# Altium PCB MSampler.PcbDoc
Units mil, origin at the board's own origin, x right, y up, seen from the top; angles counter-clockwise.
Board outline 2555.12 x 1345 mil, 2 copper layers (Top Layer, Bottom Layer), stack 12.8 mil thick; 97 components, 66 nets, 327 pads, 353 vias.
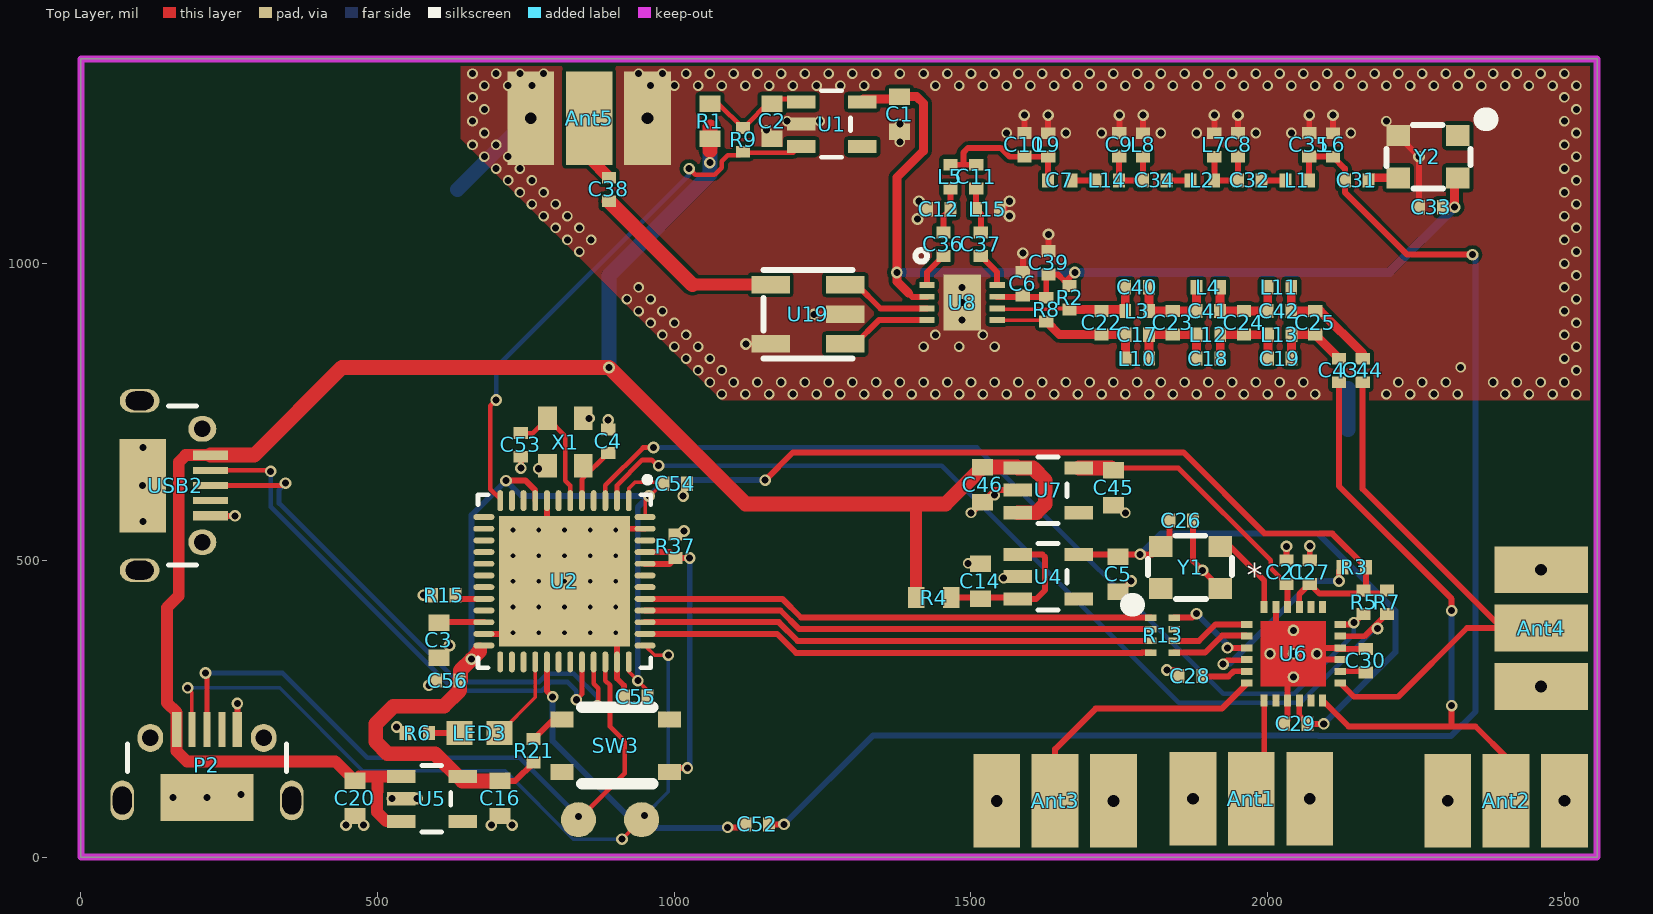
[diagram p0: Top Layer view]
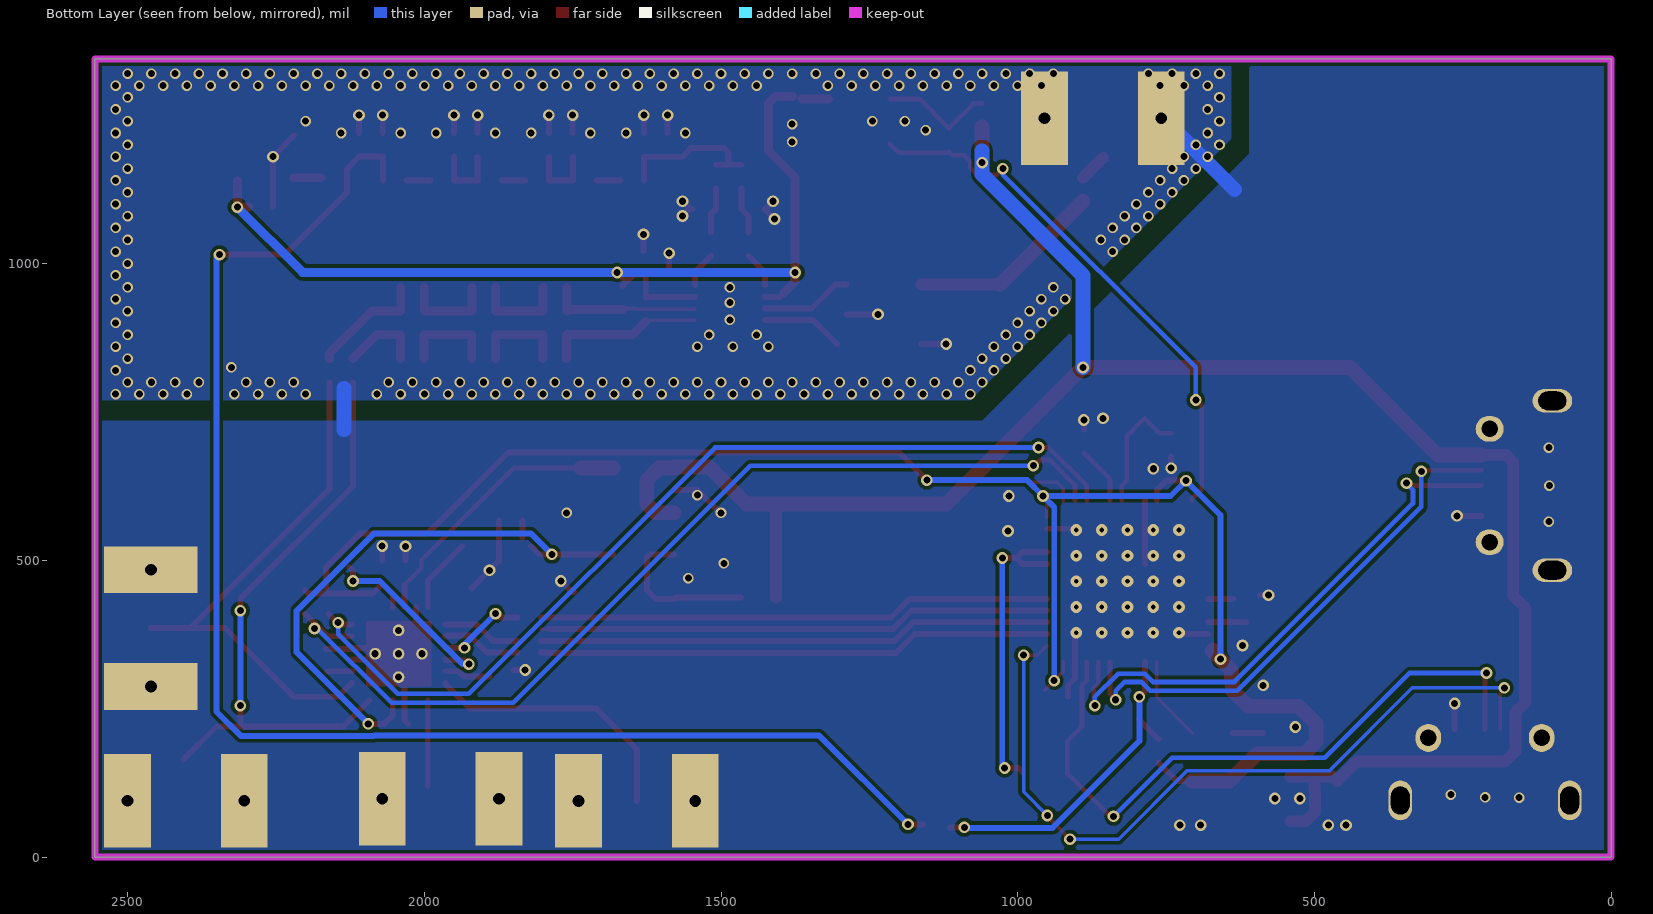
[diagram p1: Bottom Layer view, seen from below]

## Layer stack, top to bottom
Top Solder: solder mask 0.4, Solder Resist, Dk 3.5
Top Layer: signal copper 1.4
Dielectric 1: core 10, FR-4, Dk 4.2
Bottom Layer: signal copper 1.4
Bottom Solder: solder mask 0.4, Solder Resist, Dk 3.5

## Board outline
0,0 0,1345 2555.12,1345 2555.12,0

## Design rules (kind name [scope] priority, off if disabled: settings)
Clearance Clearance_1 [(InNamedPolygon('Bottom Layer-No Net')) vs Not InNet('GND')] p1: gap=15 ignorepadtopadclearanceinfootprint=FALSE except(0: Arc-Hole Track-Hole SMDPad-Hole THPad-Hole Via-Hole Fill-Hole Poly-Hole Region-Hole Text-Hole)
Clearance [All] p2: gap=6 ignorepadtopadclearanceinfootprint=FALSE except(0: Arc-Hole Track-Hole SMDPad-Hole THPad-Hole Via-Hole Fill-Hole Poly-Hole Region-Hole Text-Hole)
DiffPairsRouting [All] p1: maxlimit=10 minlimit=10 mostfreqgap=10 toplayer_minwidth=5.98 toplayer_maxwidth=15 toplayer_prefwidth=15 bottomlayer_minwidth=5.98 bottomlayer_maxwidth=15 bottomlayer_prefwidth=15 maxuncoupledlength=500
HoleSize [All] p1: absolutevalues=TRUE maxlimit=120 minlimit=1 maxpercent=80.000 minpercent=20.000
MinimumSolderMaskSliver [All] p1 off: minsoldermaskwidth=10
PlaneClearance [All] p1: clearance=10
PlaneConnect [All] p1: planeconnectstyle=Direct reliefexpansion=20 reliefentries=4 reliefconductorwidth=10 reliefairgap=10
PolygonConnect [All] p1: connectstyle=Direct reliefconductorwidth=10 reliefentries=4 polygonreliefangle="90 Angle" airgapwidth=10
RoomDefinition MX [InComponentClass('MX')] p1 off: confinementstyle=ConfineIn formatcopy=TRUE lockcomponents=FALSE outline 2602.11,753.47 12306.82,753.47 12306.82,1151.1 2602.11,1151.1
RoomDefinition audio [InComponentClass('audio')] p2 off: confinementstyle=ConfineIn formatcopy=TRUE lockcomponents=FALSE outline -2549.45,202.29 -2037.64,202.29 -2037.64,586.14 -2549.45,586.14
RoomDefinition power [InComponentClass('power')] p3 off: confinementstyle=ConfineIn formatcopy=TRUE lockcomponents=FALSE outline -2549.45,920.79 -1456.93,920.79 -1456.93,1206.22 -2549.45,1206.22
RoomDefinition MCU [InComponentClass('MCU')] p4 off: confinementstyle=ConfineIn formatcopy=TRUE lockcomponents=FALSE outline -2057.16,232.06 287.84,232.06 287.84,472.06 -2057.16,472.06
RoutingVias [All] p1: holewidth=12 width=20 viastyle="Through Hole" minholewidth=11.81 minwidth=19.68 maxholewidth=28 maxwidth=50
SilkToBoardRegionClearance [All] p1 off:
SilkToSilkClearance [All] p1 off: silktosilkclearance=10
SilkToSolderMaskClearance [IsPad] p1 off: minsilkscreentomaskgap=10 clearancetoexposedcopper=TRUE
SolderMaskExpansion [All] p1: expansion=4
Width [All] p1: maxlimit=60 minlimit=6 preferedwidth=6
22 further rules are at their usual default settings.

## Classes and differential pairs
component class power: C1 C2 C5 C14 C16 C20 C45 C46 R1 R4 R9 U1 U4 U5 U7
component class MCU: C3 C4 C53 C54 C55 C56 LED3 P2 R6 R13 R15 R21 R37 SW3 U2 USB2 X1
component class audio: Ant1 Ant2 Ant3 Ant4 C21 C26 C27 C28 C29 C30 R3 R5 R7 R26 U6 Y1
component class MX: Ant5 C6 C7 C8 C9 C10 C11 C12 C17 C18 C19 C22 C23 C24 C25 C31 C32 C33 C34 C35 C36 C37 C38 C39 C40 C41 C42 C43 C44 L1 L2 L3 L4 L5 L6 L7 L8 L9 L10 L11 L12 L13 L14 L15 R2 R8 U8 U19 Y2

## Components (designator, comment, footprint, x,y, rotation, side; value= is the part's Value field where it differs from the comment)
Ant1 "Antenna" SMA 2070.87,98.43 r180 top
Ant2 "Antenna" SMA 2500,95 r180 top
Ant3 "Antenna" SMA 1740.16,94.49 r180 top
Ant4 "Antenna" SMA 2460.63,484.25 r270 top
Ant5 "Antenna" SMA 955,1245 r180 top
C1 "4.7uF" 0603L 1379.61,1251.81 r90 top
C2 "4.7uF" 0603L 1165,1240 r90 top
C3 "Cap" 0603L 603.46,365.25 r90 top value=4.7uF
C4 "Cap" 0402 888.54,700.79 r270 top value=20pF
C5 "4.7uF" 0603L 1748.03,476.38 r90 top
C6 "100pF" 0402 1587.4,965.67 r90 top
C7 "3.6pF" 0402 1650,1140 r180 top
C8 "68pF" 0402 1950,1200 r90 top
C9 "68pF" 0402 1750,1200 r90 top
C10 "47pF" 0402 1590,1200 r90 top
C11 "5.3pF" 0402 1508.66,1146.77 r270 top
C12 "5.3pF" 0402 1445.67,1091.65 r180 top
C14 "4.7uF" 0603L 1515.75,464.57 r270 top
C16 "4.7uF" 0603L 706.72,98.71 r90 top
C17 "2.2pF" 0402 1780,880 r0 top
C18 "11pF" 0402 1900,840 r0 top
C19 "7.5pF" 0402 2020,840 r0 top
C20 "4.7uF" 0603L 461.72,98.71 r90 top
C21 "1uF" 0402 2031.5,480.32 r270 top
C22 "22pF" 0402 1720,900 r90 top
C23 "27pF" 0402 1840,900 r90 top
C24 "22pF" 0402 1960,900 r90 top
C25 "18pF" 0402 2080,900 r90 top
C26 "1uF" 0402 1854.33,566.93 r180 top
C27 "1uF" 0402 2070.87,480.32 r270 top
C28 "1uF" 0402 1870,305 r180 top
C29 "1uF" 0402 2047.24,224.41 r0 top
C30 "1uF" 0402 2165.35,330.71 r270 top
C31 "100pF" 0402 2150,1140 r180 top
C32 "3.6pF" 0402 1970,1140 r180 top
C33 "0.1uF" 0402 2275,1095 r0 top
C34 "3.3pF" 0402 1810,1140 r180 top
C35 "47pF" 0402 2070,1200 r90 top
C36 "100pF" 0402 1453.54,1032.6 r90 top
C37 "100pF" 0402 1516.54,1032.6 r90 top
C38 "100pF" 0402 890,1125 r270 top
C39 "100pF" 0402 1630.71,1001.1 r90 top
C40 "7.5pF" 0402 1780,960 r180 top
C41 "11pF" 0402 1900,920 r180 top
C42 "2.2pF" 0402 2020,920 r180 top
C43 "7.5pF" 0402 2120,820 r270 top
C44 "7.5pF" 0402 2160,820 r270 top
C45 "4.7uF" 0603L 1740.16,622.05 r90 top
C46 "4.7uF" 0603L 1519.43,627.48 r90 top
C52 "1nF" 0402 1140,55 r180 top
C53 "Cap" 0402 741.46,694.25 r90 top value=20pF
C54 "Cap" 0402 1001.86,629.11 r180 top value=0.1uF
C55 "Cap" 0402 935,270 r0 top value=0.1uF
C56 "Cap" 0402 618.11,297.24 r0 top value=0.1uF
L1 "Inductor" 0402 2050,1140 r180 top value=82nH
L2 "Inductor" 0402 1890,1140 r180 top value=82nH
L3 "Inductor" 0402 1780,920 r180 top value=27nH
L4 "Inductor" 0402 1900,960 r180 top value=27nH
L5 "Inductor" 0402 1465.35,1146.77 r270 top value=53nH
L6 "Inductor" 0402 2110,1200 r270 top value=6.8nH
L7 "Inductor" 0402 1910,1200 r270 top value=3.9nH
L8 "Inductor" 0402 1790,1200 r270 top value=3.9nH
L9 "Inductor" 0402 1630,1200 r270 top value=6.8nH
L10 "Inductor" 0402 1780,840 r0 top value=39nH
L11 "Inductor" 0402 2020,960 r180 top value=39nH
L12 "Inductor" 0402 1900,880 r0 top value=27nH
L13 "Inductor" 0402 2020,880 r0 top value=27nH
L14 "Inductor" 0402 1730,1140 r180 top value=82nH
L15 "Inductor" 0402 1528.35,1091.65 r0 top value=53nH
LED3 "LED0" 0603 672.26,208.97 r180 top
P2 "SWD_MicroUSB" MICRO-YZX 212.6,-15.75 r0 top
R1 "FB" 0603L 1060,1240 r270 top value=0Ohm
R2 "NC" 0402 1666.14,942.05 r90 top
R3 "Res2" 0402 2145.67,488.19 r0 top value=10k
R4 "FB" 0603L 1437.01,437.01 r180 top value=0Ohm
R5 "Res2" 0402 2161.42,429.13 r90 top value=10k
R6 "10k" 0402 567.26,208.97 r180 top value=0Ohm
R7 "Res2" 0402 2200.79,429.13 r90 top value=10k
R8 "NC" 0402 1626.77,922.36 r90 top
R9 "10k" 0402 1115.83,1208.19 r90 top value=0Ohm
R13 "Res*4" 0402X4 1822.83,374.02 r180 top value=200Ohm
R15 "10k" 0402 611.46,441.25 r180 top value=0Ohm
R21 "1k" 0402 762.92,179.11 r270 top value=0Ohm
R37 "Res2" 0402 1001.97,523.62 r90 top value=10k
SW3 "SW-PB" SW3x4 901.46,187.48 r180 top
U1 "LP5907" SOT23-5 1265,1235 r270 top
U2 "STM32F401CCU6" STM-UFQFPN48_N 814.96,464.57 r270 top
U4 "LP5907" SOT23-5 1629.92,472.44 r270 top
U5 "LP5907" SOT23-5 591.28,98.2 r270 top
U6 "TLV320ADC3101" TLV320ADC3101 2043.31,342.52 r0 top
U7 "LP5907" SOT23-5 1629.92,618.11 r270 top
U8 "LT5560" LT5560 1485.04,934.17 r0 top
U19 "TCM1-13MX+" TCM-13M+ 1225.2,914.49 r270 top
USB2 "USB Micro Type B" MICRO-YZX -11.81,625.98 r270 top
X1 "24.000 KHz 3.2x2.5mm 8-10pf" OSCILLATOR-2.5x2.0 816.46,699.25 r90 top
Y1 "OSC_40M" TXC_7Q 1870.08,488.19 r0 top
Y2 "100M" TXC_7Q 2270,1180 r180 top

## Footprints (in the part's own frame and the unit in brackets; to place one, negate y for a bottom-side part, rotate by r counter-clockwise, add the part's x,y. Pads: shape width x height; smd on the part's side, far side on the other; paste and mask are expansions set on the pad)
0402 [mil] "0402-RES"
  rect 20x24 smd: 1(-19.69,0) 2(20,0)
0402X4 [mm]
  rect 0.5x0.28 smd: 1(-0.5,0.75) 2(-0.5,0.25) 3(-0.5,-0.25) 4(-0.5,-0.75) 5(0.5,-0.75) 6(0.5,-0.25) 7(0.5,0.25) 8(0.5,0.75)
0603 [mil] "0603-RES"
  rect 44x40 smd: 1(-33.46,0) 2(34,0)
  body extent -31,-16 31,16, height 31
0603L [mm]
  rect 0.7x0.9 smd: 1(-0.75,0) 2(0.75,0)
  body extent -0.8,-0.4 0.8,0.4, height 0.8
LT5560 [mm]
  rect 1.6x2.4 smd: 0(0,0)
  rect 0.65x0.25 smd: 1(-1.5,0.75) 2(-1.5,0.25) 3(-1.5,-0.25) 4(-1.5,-0.75) 5(1.5,-0.75) 6(1.5,-0.25) 7(1.5,0.25) 8(1.5,0.75)
  silkscreen extent -2,1.75 -1.5,2.25, body extent -1.5,-1.5 1.5,1.5, height 0.75
MICRO-YZX [mm]
  rect 0.4x1.5 smd: 1(-1.3,5.85) 5(1.3,5.85)
  rect 0.3x1.5 smd: 2(-0.65,5.85) 3(0,5.85) 4(0.65,5.85)
  oval 1x1.7 hole 0.8 slot 1.2 at 90 deg: 5(-3.625,2.82) 5(3.625,2.82)
  oval 1.1x1.2 hole 0.7: 5(-2.425,5.5) 5(2.425,5.5)
  rect 4x2 smd: 5(0,2.95)
  silkscreen extent -3.4,4.05 3.4,5.25, body extent -4.02,0.33 3.98,5.93, height 2.6
OSCILLATOR-2.5x2.0 [mil] "OSCILLATOR-3.2X2.5"
  rect 39.37x31.5 smd: 1(-40,-30) 2(40,-30) 3(40,30) 4(-40,30)
  body extent -50,-40 50,40, height 35
SMA [mm]
  rect 2x4 smd: 1(2.5,0)
  rect 2x4 hole 0.5: GND(0,0) GND(5,0)
SOT23-5 [mil] "SOT23-5"
  rect 22x48 smd: 1(-37.4,-51.19) 2(0,-51.19) 3(38,-51.19) 4(38,52) 5(-37.4,52)
  silkscreen extent -56,-17 56,32, body extent -57,-55 57,55, height 47
STM-UFQFPN48_N [mm] "QFN, 48-Leads, Body 7.1x7.1mm, Pitch 0.5mm, Thermal Pad 5.6x5.6mm, IPC Medium Density"
  oval 0.9x0.25 smd: 1(-3.45,2.75) 2(-3.45,2.25) 3(-3.45,1.75) 4(-3.45,1.25) 5(-3.45,0.75) 6(-3.45,0.25) 7(-3.45,-0.25) 8(-3.45,-0.75) 9(-3.45,-1.25) 10(-3.45,-1.75) 11(-3.45,-2.25) 12(-3.45,-2.75) 25(3.45,-2.75) 26(3.45,-2.25) 27(3.45,-1.75) 28(3.45,-1.25) 29(3.45,-0.75) 30(3.45,-0.25) 31(3.45,0.25) 32(3.45,0.75) 33(3.45,1.25) 34(3.45,1.75) 35(3.45,2.25) 36(3.45,2.75)
  oval 0.25x0.9 smd: 13(-2.75,-3.45) 14(-2.25,-3.45) 15(-1.75,-3.45) 16(-1.25,-3.45) 17(-0.75,-3.45) 18(-0.25,-3.45) 19(0.25,-3.45) 20(0.75,-3.45) 21(1.25,-3.45) 22(1.75,-3.45) 23(2.25,-3.45) 24(2.75,-3.45) 37(2.75,3.45) 38(2.25,3.45) 39(1.75,3.45) 40(1.25,3.45) 41(0.75,3.45) 42(0.25,3.45) 43(-0.25,3.45) 44(-0.75,3.45) 45(-1.25,3.45) 46(-1.75,3.45) 47(-2.25,3.45) 48(-2.75,3.45)
  rect 5.6x5.6 smd: 49(0,0)
  silkscreen extent -4.47,-3.7 3.7,3.7, body extent -3.55,-3.55 3.55,3.55, height 0.6
SW3x4 [mm]
  rect 1x0.7 smd: 1(-2.3,1.125) 2(2.3,-1.125) 3(2.3,1.125) 4(-2.3,-1.125)
  silkscreen extent -1.58,-1.65 1.45,1.63, body extent -2,-1.5 2,1.5, height 2.6
TCM-13M+ [mm]
  rect 0.75x1.65 smd: 1(-1.27,1.6) 2(0,1.6) 3(1.27,1.6) 4(1.27,-1.6) 5(-1.27,-1.6)
  silkscreen extent -1.9,-1.9 1.9,1.9
TLV320ADC3101 [mm]
  round 0.5 hole 0.3: 0(-1,0) 0(0,-1) 0(0,0) 0(0,1) 0(1,0)
  rect 0.5x0.3 smd: 1(-2,1.25) 2(-2,0.75) 3(-2,0.25) 4(-2,-0.25) 5(-2,-0.75) 6(-2,-1.25) 13(2,-1.25) 14(2,-0.75) 15(2,-0.25) 16(2,0.25) 17(2,0.75) 18(2,1.25)
  rect 0.3x0.5 smd: 7(-1.25,-2) 8(-0.75,-2) 9(-0.25,-2) 10(0.25,-2) 11(0.75,-2) 12(1.25,-2) 19(1.25,2) 20(0.75,2) 21(0.25,2) 22(-0.25,2) 23(-0.75,2) 24(-1.25,2)
  Top Layer region: -1.4,-1.4 1.4,-1.4 1.4,1.4 -1.4,1.4
  body extent -2,-2 2,2, height 0.8
TXC_7Q [mm]
  rect 1x0.9 smd: 1(-1.275,-0.9) 2(1.275,-0.9) 3(1.275,0.9) 4(-1.275,0.9)
  silkscreen extent -2.52,-1.6 1.78,1.35

## Part data
C1 C2 C5 C14 C16 C20 C21 C26 C27 C28 C29 C30 C45 C46 C52: library part Cap, "Capacitor"
  C1 C2 C5 C14 C16 C20 C45 C46: LatestRevisionDate=17-Jul-2002, LatestRevisionNote="Re-released for DXP Platform.", PackageDescription="Radial Cap, Thru-Hole; 2 Leads; 0.3 in Pin Spacing", PackageReference=RAD-0.3, Published=8-Jun-2000, Publisher="Altium Limited"
C3 C4 C53 C54 C55 C56: "Capacitor", LatestRevisionDate=17-Jul-2002, LatestRevisionNote="Re-released for DXP Platform.", PackageDescription="Radial Cap, Thru-Hole; 2 Leads; 0.3 in Pin Spacing", PackageReference=RAD-0.3, Published=8-Jun-2000, Publisher="Altium Limited"
C6 C7 C8 C9 C10 C11 C12 C17 C18 C19 C22 C23 C24 C25 C31 C32 C33 C34 C35 C36 C37 C38 C39 C40 C41 C42 C43 C44: library part CAP0402-CAP, "<b>Capacitor</b> / Standard 0603 ceramic capacitor, and 0.1\" leaded capacitor.", PARTNO=CC0402ZRY5V7BB104
LED3: "Typical INFRARED GaAs LED", LatestRevisionDate=08-Jul-2005, LatestRevisionNote="Mech Layer 1 removed.", PackageDescription="LED; 2 Leads", PackageReference=LED-0, Published=8-Jun-2000, Publisher="Altium Limited"
P2: "Connector SMD USB Micro Type B middle mount", Manufacturer 1="Molex Inc", Package / Case=SMD, Supplier Part Number 1=WM17142CT-ND, SCDType=undef, Supplier 1=Digi-Key
R1 R2 R4 R6 R8 R9 R15 R21: library part Res2, "Resistor", LatestRevisionDate=17-Jul-2002, LatestRevisionNote="Re-released for DXP Platform.", PackageDescription="Axial Device, Thru-Hole; 2 Leads; 0.4 in Pin Spacing", PackageReference=AXIAL-0.4, Published=8-Jun-2000, Publisher="Altium Limited"
R3 R5 R7 R13 R37: "Resistor", LatestRevisionDate=17-Jul-2002, LatestRevisionNote="Re-released for DXP Platform.", PackageDescription="Axial Device, Thru-Hole; 2 Leads; 0.4 in Pin Spacing", PackageReference=AXIAL-0.4, Published=8-Jun-2000, Publisher="Altium Limited"
SW3: "Switch", LatestRevisionDate=17-Jul-2002, LatestRevisionNote="Re-released for DXP Platform.", PackageDescription="Switch; 2 Leads", PackageReference=SPST-2, Published=24-Mar-1999, Publisher="Altium Limited"
U2: "ARM Cortex-M4 32-bit MCU+FPU, 105 DMIPS, 256 kB Flash, 64 kB Internal RAM, 36 I/Os, 48-pin UFQFPN, -40 to 85 degC, Tray", I/Os (High Current)=36, Manufacturer=STMicroelectronics, Operating Frequency(F) (Processor speed) (MHz)=84, Supplier Part Number 1=19X6217, Supply Voltage(Vcc) max (V)=3.6, Supply Voltage(Vcc) min (V)=1.8, ComponentLink1Description="Manufacturer URL", ComponentLink1URL=http://www.st.com/web/en/home.html, ComponentLink2Description=Datasheet, ComponentLink2URL=http://www.st.com/st-web-ui/static/active/en/resource/technical/document/data_brief/DM00071938.pdf, ComponentLink3Description="Package Specification", ComponentLink3URL=http://www.st.com/st-web-ui/static/active/en/resource/technical/document/data_brief/DM00071938.pdf, Core="ARM Cortex-M4", DatasheetVersion="Rev. 1", FLASH Size (Prog) (kB)=256, Internal RAM Size (kB)=64, Mounting Technology="Surface Mount", PackageDescription="48-Pin Ultra Thin Fine Pitch Quad Flat No-Lead, 7 x 7 x 0.6 mm Body, 0.5 mm Pitch, Exposed Pad", PackageReference=UFQFPN48, PackageVersion="Rev. 1, 04/2013", Packing=Tray, PartNumber=STM32F401CCU6, Supplier 1=Newark, Supplier 2=Mouser, Supplier Part Number 2=511-STM32F401CCU6
U19: library part TCM-63AX+
USB2: library part USB_Micro_TypeB, "Connector SMD USB Micro Type B middle mount", Manufacturer 1="Molex Inc", Manufacturer Part Number 1=47491-0001, Package / Case=SMD, Supplier Part Number 1=WM17142CT-ND, SCDType=undef, Supplier 1=Digi-Key
X1: library part OSCILLATOR-3.2X2.5, "Crystal Oscillator in 3.2x2.5 SMD"
Y2: library part OSC_40M
L1 L2 L3 L4 L5 L6 L7 L8 L9 L10 L11 L12 L13 L14 L15: Code_IEC=1005, Code_JEITA=0402, LatestRevisionDate=29-May-2009, LatestRevisionNote="IPC-7351 Footprint Added.", PackageDescription="Chip Inductor", PackageReference=0402-A, Published=8-Jun-2000, Publisher="Altium Limited"

## Free pads (board coordinates)
  round 59.06 smd: 0(944.88,62.99) 8(838.58,62.99)

## Via types
v1: diameter 17.72, hole 11.81, Top Layer to Bottom Layer, 248 vias
v2: diameter 19.68, hole 11.81, Top Layer to Bottom Layer, 80 vias
v3: diameter 19.68, hole 7.87, Top Layer to Bottom Layer, 25 vias

## Nets (pads, with @x,y where several pads share a name; then routed paths per layer and width w, separated by ;. In a path a pad name is that pad's centre, name@x,y a point inside that pad or via, vN(x,y) a via of type N, cw(c..) or ccw(c..) an arc to the next point about the centre after c; other vN are vias at no path point)
1.8D: C21.2 C45.2 U6.22 U7.5 | length 475.2
  Top Layer w8: C45.2@1736.22,655.51 1849.49,655.51 2005,500 2005,486.81 C21.2
  Top Layer w10: U6.22 C21.2@2033.46,458.35
  Top Layer w25: U7.5 C45.2@1736.22,655.51
3.3A: C5.2 C26.2 C29.2 U4.5 U6.10 Y1.4 | length 983.8
  Top Layer w10: U4.5 1806.1,509.84 Y1.4 ; Y1.4@1834.33,538.07 C26.2 ; U6.10 2053.15,238.5 C29.2 v2(2094.41,224.41)
  Bottom Layer w10: v2(1785,510) 1819.98,544.98 2085.02,544.98 2215,415 2215,345 v2(2094.41,224.41)
3.3D: C16.2 C27.2 C54.2 C55.2 C56.2 R3.2 R5.2 R7.2 R21.2 U2.1 U2.9 U2.24 U2.36 U2.48 U5.5 U6.21 | length 3365.4
  Top Layer w6: U2.36 923.23,312.48 v2(938.46,297.24) C55.2@955,280.71 ; U2.1 923.23,621.02 933.78,631.57 982.28,631.57 950.79,600.08 U2.48
  Top Layer w10: U5.5 C16.2@699.35,135.6 ; C16.2 732.05,128.24 R21.2 ; v2(716.46,634.25) 749.46,634.25 765.75,617.96 U2.9 ; v2(1153.21,635) 1200,681.79 1858.21,681.79 1995,545 2108.86,545 R3.2 R5.2@2165.67,453.39 ; U6.21 2053.15,442.6 C27.2 2087.02,444.16 2195.81,444.16 R7.2
  Top Layer w25: 671.86,349.11 671.86,346.65 v2(658.46,333.25) 639.67,314.47 639.67,297.24 C56.2 638.11,280.36 611.86,254.11 526.86,254.11 496.86,224.11 496.86,194.11 516.86,174.11 596.86,174.11 642.73,128.24 C16.2
  Bottom Layer w10: v2(658.46,333.25) 658.46,576.25 v2(716.46,634.25) 742.46,608.25 v2(957.46,608.25) ; v2(938.46,297.24) 938.46,589.26 v2(957.46,608.25) ; v2(1153.21,635) 984.2,635 v2(957.46,608.25)
3.3M: C1.2 C6.1 C33.2 C39.1 R2.2 R8.2 U1.5 U8.2 U8.7 Y2.4 | length 1711.6
  Top Layer w10: 1395,950 1400.98,944.02 U8.2 ; U8.7 1625.12,944.02 R8.2 1626.77,977.48 C39.1 1646.77,981.42 R2.2@1656.59,971.59 ; R2.2 R2.2@1656.59,971.59 ; v2(1675,985) 1661.59,971.59 R2.2@1656.59,971.59
  Top Layer w15: U1.5@1318.93,1277.33 C1.2@1363.61,1277.33 ; C1.2 1408.66,1281.34 1420,1270 1420,1190 1375,1145 v2(1375,985) 1375,970 1395,950 ; C33.2 v2(2315,1095) Y2.4@2315,1139.37
  Bottom Layer w15: v2(1375,985) v2(1675,985) 2205,985 v2(2315,1095)
5V: C20.2 C46.2 P2.1 R1.2 R4.2 U5.1 U5.3 U7.1 U7.3 USB2.1 | length 3382.3
  Top Layer w20: USB2.1 176.66,677.17 165,665.5 165,440 145,420 145,260 161.42,243.58 P2.1 161.42,178.58 178.83,161.17 428.79,161.17 C20.2 ; C20.2@469.08,135.6 500,135.6 ; U5.3 514.8,60.2 498.87,76.13 498.87,109.41 500,110.54 500,135.6 ; U5.1 500,135.6 ; R4.2 1407.48,595
  Top Layer w25: USB2.1 292.17,677.17 440,825 v2(890,825) 1120,595 1457.42,595 C46.2 U7.1@1577.24,657.01 ; 1060,1190 1060,1230.47 ; U7.3 1610.11,580.11 1625,595 1625,635 1604.49,655.51 U7.1
  Bottom Layer w25: v2(890,825) 890,980 1060,1150 1060,1190
  other v2: 1060,1170
GND: Ant1.GND Ant2.GND Ant3.GND Ant4.GND Ant5.GND C1.1 C2.1 C3.1 C4.1 C5.1 C6.2 C8.2 C9.2 C10.2 C12.2 C14.1 C16.1 C20.1 C21.1 C26.1 C27.1 C28.2 C29.1 C30.1 C33.1 C35.2 C39.2 C45.1 C46.1 C53.1 C54.1 C55.1 C56.1 L6.1 L7.1 L8.1 L9.1 L15.2 P2.5 R6.2 R15.2 R37.2 U1.2 U2.8 U2.23 U2.35 U2.47 U2.49 U4.2 U5.2 U6.0 U6.9 U6.15 U6.16 U6.23 U7.2 U8.0 U19.2 U19.4 USB2.5 X1.2 X1.4 Y1.2 Y2.2 | length 1917.7
  Top Layer w10: USB2.5@218.5,574.8 v2(259.8,574.8) ; P2.5@263.78,214.57 v2(263.78,258.78) ; v2(577.46,441.25) R15.2 ; U2.23 U2.49@726.38,375.98 ; v2(741.46,655.25) C53.1 ; U2.49@785.43,494.09 U2.8 ; C4.1 v2(888.54,736.34) ; U2.49@903.54,375.98 U2.35 903.54,300.8 915.32,289.02 C55.1 ; U2.49@903.54,553.15 U2.47 ; v2(1120.51,864.49) U19.4 ; v2(1235.51,914.49) U19.2 ; v2(1410,1075) 1425.67,1090.67 C12.2 v2(1412.32,1105) ; v1(1500,580) 1501.48,580 C46.1 1539.59,618.11 U7.2 ; L15.2 L15.2@1551.65,1091.65 ; v2(1565,1080) 1553.35,1091.65 L15.2@1551.65,1091.65 ; v2(1565,1105) L15.2@1551.65,1091.65 ; C6.2 v2(1587.4,1017.4) ; C10.2 v2(1590,1250) ; L9.1 v2(1630,1250) ; C39.2 v2(1630.71,1049.29) ; C5.1 1751.85,446.85 v2(1770,465) ; C9.2 v2(1750,1250) ; L8.1 v2(1790,1250) ; v2(1830,315) C28.2@1850,315 ; C26.1 1874.02,499.02 v2(1890,483.03) Y1.2 ; L7.1 v2(1910,1250) ; C8.2 v2(1950,1250) ; 2013.78,361.22 U6.23 ; C29.1 2033.46,230.31 U6.9 2033.46,293.31 ; C21.1 v2(2031.5,523.5) ; 2062.68,332.68 U6.15 ; 2067.64,352.36 U6.16 ; C35.2 v2(2070,1250) ; C27.1 v2(2070.87,524.13) ; L6.1 v2(2110,1250) ; U6.16@2116.97,350.39 C30.1 ; Y2.2 v2(2255,1180.24) 2255,1095.32 C33.1
  Bottom Layer w10: Ant5.GND@743.15,1233.15 Ant5.GND@743.15,1250
  Bottom Layer w25: 635,1125 Ant5.GND@743.15,1233.15 ; 2135,720 2135,790
  other v1: 155,100 212.6,100.39 270,105 1555,470 1495,495 105,565 1760,580 1540,610 104.33,625.98 105,690 1080,780 1120,780 1160,780 1200,780 1240,780 1280,780 1320,780 1360,780 1400,780 1440,780 1480,780 1520,780 1560,780 1600,780 1640,780 1680,780 1720,780 1760,780 1800,780 1840,780 1880,780 1920,780 1960,780 2000,780 2040,780 2080,780 2200,780 2240,780 2280,780 2320,780 2400,780 2440,780 2480,780 2520,780 1060,800 1100,800 1140,800 1180,800 1220,800 1260,800 1300,800 1340,800 1380,800 1420,800 1460,800 1500,800 1540,800 1580,800 1620,800 1660,800 1700,800 1740,800 1780,800 1820,800 1860,800 1900,800 1940,800 1980,800 2020,800 2060,800 2220,800 2260,800 2300,800 2380,800 2420,800 2460,800 2500,800 1040,820 1080,820 2520,820 2325,825 1020,840 1060,840 2500,840 1000,860 1040,860 1420,860 1480,860 1540,860 2520,860 980,880 1020,880 1440,880 1520,880 2500,880 960,900 1000,900 2520,900 1485,905 940,920 980,920 2500,920 1485.04,934.17 920,940 960,940 2520,940 940,960 1485,960 2500,960 2520,980 2500,1000 840,1020 2520,1020 820,1040 860,1040 2500,1040 800,1060 840,1060 2520,1060 780,1080 820,1080 2500,1080 760,1100 800,1100 2520,1100 740,1120 780,1120 2500,1120 720,1140 760,1140 2520,1140 700,1160 740,1160 2500,1160 680,1180 720,1180 2520,1180 660,1200 700,1200 2500,1200 1380,1205 680,1220 1560,1220 1660,1220 1720,1220 1820,1220 1880,1220 1980,1220 2040,1220 2140,1220 2520,1220 1155,1225 1380,1235 660,1240 1190,1240 1245,1240 2200,1240 2500,1240 680,1260 2520,1260 660,1280 2500,1280 680,1300 720,1300 760,1300 960,1300 1000,1300 1040,1300 1080,1300 1120,1300 1160,1300 1200,1300 1240,1300 1280,1300 1320,1300 1440,1300 1480,1300 1520,1300 1560,1300 1600,1300 1640,1300 1680,1300 1720,1300 1760,1300 1800,1300 1840,1300 1880,1300 1920,1300 1960,1300 2000,1300 2040,1300 2080,1300 2120,1300 2160,1300 2200,1300 2240,1300 2280,1300 2320,1300 2360,1300 2400,1300 2440,1300 2480,1300 2520,1300 660,1320 700,1320 740,1320 780,1320 940,1320 980,1320 1020,1320 1060,1320 1100,1320 1140,1320 1180,1320 1220,1320 1260,1320 1300,1320 1340,1320 1380,1320 1420,1320 1460,1320 1500,1320 1540,1320 1580,1320 1620,1320 1660,1320 1700,1320 1740,1320 1780,1320 1820,1320 1860,1320 1900,1320 1940,1320 1980,1320 2020,1320 2060,1320 2100,1320 2140,1320 2180,1320 2220,1320 2260,1320 2300,1320 2340,1320 2380,1320 2420,1320 2460,1320 2500,1320
  other v2: 446.72,53.71 476.72,53.71 691.72,53.71 726.72,53.71 524.72,98.71 566.72,98.71 532.26,218.97 586.46,289.25 621.19,356.28 1016.46,549.25 1014.89,608.24 771.46,654.25 856.46,739.25
  other v3: 728.35,377.95 771.65,377.95 814.96,377.95 858.27,377.95 901.57,377.95 728.35,421.26 771.65,421.26 814.96,421.26 858.27,421.26 901.57,421.26 728.35,464.57 771.65,464.57 814.96,464.57 858.27,464.57 901.57,464.57 728.35,507.87 771.65,507.87 814.96,507.87 858.27,507.87 901.57,507.87 728.35,551.18 771.65,551.18 814.96,551.18 858.27,551.18 901.57,551.18
KEY: R37.1 SW3.1 U2.44 U2.45 | length 523.1
  Top Layer w10: U2.44 992.13,494.09 R37.1 ; U2.45 992.13,513.78 R37.1 ; SW3.1 998.82,150 v2(1022.13,150) ; v2(1026.06,503.94) R37.1
  Bottom Layer w10: v2(1022.13,150) 1026.06,153.94 v2(1026.06,503.94)
LO_N: C11.2 C37.2 L15.1 | length 77.4
  Top Layer w10: C11.2 L15.1 1516.54,1083.78 C37.2
LO_P: C12.1 C36.2 L5.2 | length 79.1
  Top Layer w10: C36.2 1453.54,1079.84 C12.1 L5.2
NetAnt1_1: Ant1.1 U6.7 | length 143.7
  Top Layer w10: Ant1.1@1994.09,120.08 U6.7
NetAnt2_1: Ant2.1 C43.2 U6.12 | length 1012.8
  Top Layer w10: U6.12 2136.3,220 2310,220 ; C43.2 2120,625 2310,435 v2(2310,415) ; v2(2310,255) 2310,220 ; Ant2.1@2405.51,164.49 2350,220 2310,220
  Bottom Layer w10: v2(2310,255) v2(2310,415)
NetAnt3_1: Ant3.1 U6.6 | length 457.1
  Top Layer w10: Ant3.1 1641.73,181.73 1710,250 1922.61,250 1964.57,291.96 U6.6
NetAnt4_1: Ant4.1 C44.2 U6.13 | length 907.4
  Top Layer w10: U6.13 2145.35,270 2220,270 2335.83,385.83 Ant4.1@2394.17,385.83 ; C44.2 2160,620 Ant4.1@2394.17,385.83 ; Ant4.1 Ant4.1@2394.17,385.83
NetAnt5_1: Ant5.1 C38.1 | length 47.3
  Top Layer w20: Ant5.1@856.57,1178.11 C38.1
NetC2_2: C2.2 R1.1 R9.2 U1.1 | length 193.2
  Top Layer w8: R1.1 1074.49,1269.53 R9.2 1164.97,1277.33 U1.1@1215.75,1277.33
NetC3_2: C3.2 U2.22 | length 63.7
  Top Layer w10: C3.2@615.46,395.67 U2.22
NetC4_2: C4.2 U2.5 X1.1 | length 98.6
  Top Layer w8: U2.5 844.49,636.73 C4.2
NetC7_1: C7.1 L14.2 | length 40.3
  Top Layer w10: C7.1 L14.2
NetC7_2: C7.2 C10.1 C11.1 L5.1 L9.2 | length 256.4
  Top Layer w10: L5.1 1487.01,1166.46 ; C11.1 1487.01,1166.46 ; C7.2 L9.2 1565,1180 1550,1195 1495,1195 1487.01,1187.01 1487.01,1166.46
NetC8_1: C8.1 C32.2 L2.1 L7.2 | length 120.3
  Top Layer w10: L2.1 C32.2 C8.1 ; L2.1@1910,1140.32 L7.2
NetC9_1: C9.1 C34.2 L8.2 L14.1 | length 120.3
  Top Layer w10: C9.1@1749.69,1180 L14.1 C34.2 L8.2
NetC14_2: C14.2 R4.1 U4.1 U4.3 | length 269.2
  Top Layer w10: R4.1 1576.17,437.01 U4.3 1609.44,434.44 1625,450 1625,505 1620.16,509.84 U4.1
NetC17_1: C17.1 C22.1 L10.1 R8.1 U8.5 | length 263.6
  Top Layer w6: U8.5 R8.1@1624.8,904.65
  Top Layer w15: R8.1 1649.13,880.32 C22.1 1760,880.32 C17.1 L10.1
NetC17_2: C17.2 C18.1 C23.1 L10.2 L12.1 | length 160.3
  Top Layer w15: L10.2 C17.2 L12.1 C18.1
NetC18_2: C18.2 C19.1 C24.1 L12.2 L13.1 | length 160.3
  Top Layer w15: C18.2 L12.2 L13.1 C19.1
NetC19_2: C19.2 C25.1 C43.1 L13.2 | length 136.9
  Top Layer w15: C19.2 L13.2 C25.1@2079.69,880 ; C25.1 2120,840.32 C43.1
NetC22_2: C22.2 C40.2 L3.2 R2.1 U8.6 | length 256.3
  Top Layer w6: U8.6 1544.09,923.36 1642.5,923.36 1643.47,924.33 R2.1@1664.17,924.33
  Top Layer w15: R2.1 1757.64,922.36 L3.2 C40.2
NetC23_2: C23.2 C40.1 C41.2 L3.1 L4.2 | length 160.3
  Top Layer w15: C40.1 L3.1 C23.2 C41.2 L4.2
NetC24_2: C24.2 C41.1 C42.2 L4.1 L11.2 | length 160.3
  Top Layer w15: L4.1 C41.1 C24.2 C42.2 L11.2
NetC25_2: C25.2 C42.1 C44.1 L11.1 | length 198.9
  Top Layer w15: L11.1 C42.1 C25.2 2088.69,920 2160,848.68 C44.1
NetC28_1: C28.1 U6.5 | length 78.5
  Top Layer w10: C28.1@1889.69,304.16 1933.63,304.16 1942.47,312.99 U6.5
NetC30_2: C30.2 U6.14 | length 41
  Top Layer w10: U6.14 C30.2@2163.07,312.99
NetC31_1: C31.1 Y2.3 | length 45.6
  Top Layer w15: C31.1@2174.25,1144.57 Y2.3
NetC31_2: C31.2 C35.1 C52.1 L1.1 L6.2 | length 2449.6
  Top Layer w10: C52.1 v2(1185,55) ; L1.1 2069.69,1180 C35.1 2109.69,1180.32 L6.2 2130,1160 C31.2 2130,1120 2235,1015 v2(2345,1015)
  Bottom Layer w10: v2(1185,55) 1335,205 2084.34,205 2085.78,203.57 2308.57,203.57 2350,245 2350,1010 v2(2345,1015)
NetC32_1: C32.1 L1.2 | length 40.3
  Top Layer w10: C32.1 L1.2
NetC34_1: C34.1 L2.2 | length 40.3
  Top Layer w10: C34.1 L2.2
NetC36_1: C36.1 U8.1 | length 60.6
  Top Layer w10: U8.1 1425.98,985.35 C36.1
NetC37_1: C37.1 U8.8 | length 60.6
  Top Layer w10: C37.1 1544.09,985.35 U8.8
NetC38_2: C38.2 U19.5 | length 330.4
  Top Layer w20: 1030.51,964.49 U19.5
  Top Layer w25: C38.2 1030.51,964.49
NetC52_2: C52.2 U2.29 | length 518.2
  Top Layer w10: U2.29 785.43,279.57 v2(795,270) ; v2(1090,50) C52.2@1115,50
  Bottom Layer w10: v2(795,270) 795,195.52 941.37,49.16 1089.16,49.16 v2(1090,50)
NetC53_2: C53.2 U2.6 X1.3 | length 210.1
  Top Layer w8: C53.2 761.46,714.25 X1.3 816.46,709.25 816.46,634.25 824.8,625.91 U2.6
NetLED3_1: LED3.1 U2.28 | length 144.6
  Top Layer w6: LED3.1 765.75,268.99 U2.28
NetLED3_2: LED3.2 R6.1 | length 51.3
  Top Layer w10: R6.1 LED3.2
NetR3_1: R3.1 U6.4 | length 322.1
  Top Layer w10: v2(1925,325) 1931.52,331.52 1964.57,331.52 U6.4 ; v2(2120,465) 2120,482.2 R3.1
  Bottom Layer w10: v2(1925,325) 1935,325 2075,465 v2(2120,465)
NetR5_1: R5.1 U2.3 U6.18 | length 1593.6
  Top Layer w8: U2.3 883.86,626.45 947.41,690 v2(965,690)
  Top Layer w10: U6.18 2143.7,391.73 R5.1
  Bottom Layer w8: v2(965,690) 1510,690 1925,275 2045,275 2145,375 v2(2145,395)
NetR7_1: R7.1 U2.2 U6.17 | length 1640.6
  Top Layer w8: U2.2 903.54,626.34 946.32,669.11 962.17,669.11 971.86,659.43 v2(973.69,659.43)
  Top Layer w10: U6.17 2163.39,372.05 R7.1
  Bottom Layer w8: v2(973.69,659.43) 1450.57,659.43 1850,260 2055,260 2180,385 v2(2185,385)
NetR9_1: R9.1 U1.3 U2.12 | length 919.9
  Top Layer w8: v2(700,770) 690,760 690,620 706.69,603.31 U2.12 ; v2(1025,1160) 1035.2,1149.8 1067.87,1149.8 1079.84,1161.78 1079.84,1172.52 1090,1182.68 R9.1@1110,1182.68 ; R9.1 1115.83,1186.69 U1.3@1200.51,1186.69 ; U1.3@1202.32,1188.5 U1.3@1215.75,1201.93
  Bottom Layer w8: v2(700,770) 700,825 1025,1150 v2(1025,1160)
NetR13_1: R13.1 U6.2 | length 134.4
  Top Layer w10: R13.1 1894.49,344.49 1923.2,373.2 1963.41,373.2 U6.2
NetR13_2: R13.2 U6.1 | length 133.5
  Top Layer w10: R13.2 1884.17,364.17 1911.73,391.73 U6.1
NetR13_3: R13.3
NetR13_4: R13.4 U6.3 | length 151.7
  Top Layer w10: R13.4 1873.54,403.54 v2(1880,410) ; v2(1932.36,352.36) U6.3
  Bottom Layer w10: v2(1880,410) 1932.36,357.64 v2(1932.36,352.36)
NetR13_5: R13.5 U2.41 | length 865.4
  Top Layer w10: U2.41 1182.03,435.04 1213.53,403.54 R13.5
NetR13_6: R13.6 U2.40 | length 865.4
  Top Layer w6: 1790.31,383.86 R13.6
  Top Layer w10: U2.40 1179.09,415.35 1210.59,383.86 1790.31,383.86
NetR13_7: R13.7 U2.39 | length 865.5
  Top Layer w10: U2.39 1176.15,395.67 1207.8,364.02 1788.15,364.02 1788.31,364.17 R13.7
NetR15_1: R15.1 U2.20 | length 42.8
  Top Layer w10: R15.1@636.35,435.04 U2.20
NetR21_1: R21.1 SW3.2 | length 46.6
  Top Layer w10: R21.1 SW3.2@795.9,231.77
NetU6_24: U6.24 Y1.3 | length 126.3
  Top Layer w10: Y1.3@1936.38,523.62 1994.09,465.91 U6.24
NetU8_3: U8.3 U19.1 | length 154.4
  Top Layer w10: U19.1 1307.43,964.49 1347.59,924.33 U8.3
NetU8_4: U8.4 U19.3 | length 138.1
  Top Layer w10: U19.3@1304.49,864.49 1344.65,904.65 U8.4
PA9: U2.30
PA10: U2.31
PA11: U2.32 USB2.2 | length 898.4
  Top Layer w8: USB2.2 v2@318.43,651.57 ; v2(835,265) 844.49,274.49 U2.32
  Bottom Layer w8: v2(320,650) 320,590 630,280 776.94,280 791.94,295 820,295 835,280 v2(835,265)
PA12: U2.33 USB2.3 | length 933.9
  Top Layer w8: USB2.3 v2@340.98,625.98 ; U2.33 864.17,291.8 871.86,284.11 v2@871.86,256.86
  Bottom Layer w8: v2(345,630) 334,619 334,595.8 634.8,295 772.14,295 786.14,309 831,309 870,270 v2(870,255)
PA13: P2.3 pad.8 U2.34 | length 1138.5
  Top Layer w8: P2.3 v2@212.6,307.4 ; v2(838.58,68.58) pad.8 916.46,140.87 916.46,194.86 891.86,219.46 891.86,289.11 883.86,297.11 U2.34
  Bottom Layer w8: v2(210,310) 340,310 482.83,167.17 740,167.17 v2(838.58,68.58)
PA14: P2.2 pad.0 U2.37 | length 1280.1
  Top Layer w6: P2.2 187.01,277.99 ; v2(911.89,30) pad.0 ; U2.37 967.09,340 v2(990,340)
  Bottom Layer w6: v2(180,285) 335,285 475,145 715,145 830,30 v2(911.89,30) ; v2(950,70) 990,110 v2(990,340)
PA15: R13.8 U2.38 | length 865.8
  Top Layer w10: U2.38 1173.2,375.98 1205.17,344.02 1787.83,344.02 1788.31,344.49 R13.8
pads on no net: P2.4 SW3.3 SW3.4 U1.4 U2.4 U2.7 U2.10 U2.11 U2.13 U2.14 U2.15 U2.16 U2.17 U2.18 U2.19 U2.21 U2.25 U2.26 U2.27 U2.42 U2.43 U2.46 U4.4 U5.4 U6.8 U6.11 U6.19 U6.20 U7.4 USB2.4 Y1.1 Y2.1

## Polygon pours and split planes (outlines as drawn)
GND on Bottom Layer "GND_L02_P020" (solid, remove dead copper, pour order 20): 0,0 2555.12,0 2555.12,1340 0,1340
GND on Top Layer "GND_L01_P022" (solid, remove dead copper, pour order 22): 640,1340 640,1210 1080,770 2555.12,770 2555.12,1340

## Keep-outs
Keep-Out Layer:
  the board outline again, w12

## Other copper
Bottom Layer:
  pour cut-out: 1080,770 640,1210 640,1340 600,1340 610,1330 610,1185 1060,735 2555.12,735 2555,735.12 2555,770

## Text inside footprints (layer, text, board x,y; h text height)
R13: Mechanical 1 "R1" at 1815.75,381.86 h11.81 r270
U6: Top Overlay "*" at 1965,455 h39.37